# Altium PCB SolarPCB.PcbDoc
Units mil, origin at the board's own origin, x right, y up, seen from the top; angles counter-clockwise.
Board outline 7417.32 x 4742 mil, 2 copper layers (Top Layer, Bottom Layer); 114 components, 75 nets, 476 pads, 105 vias.
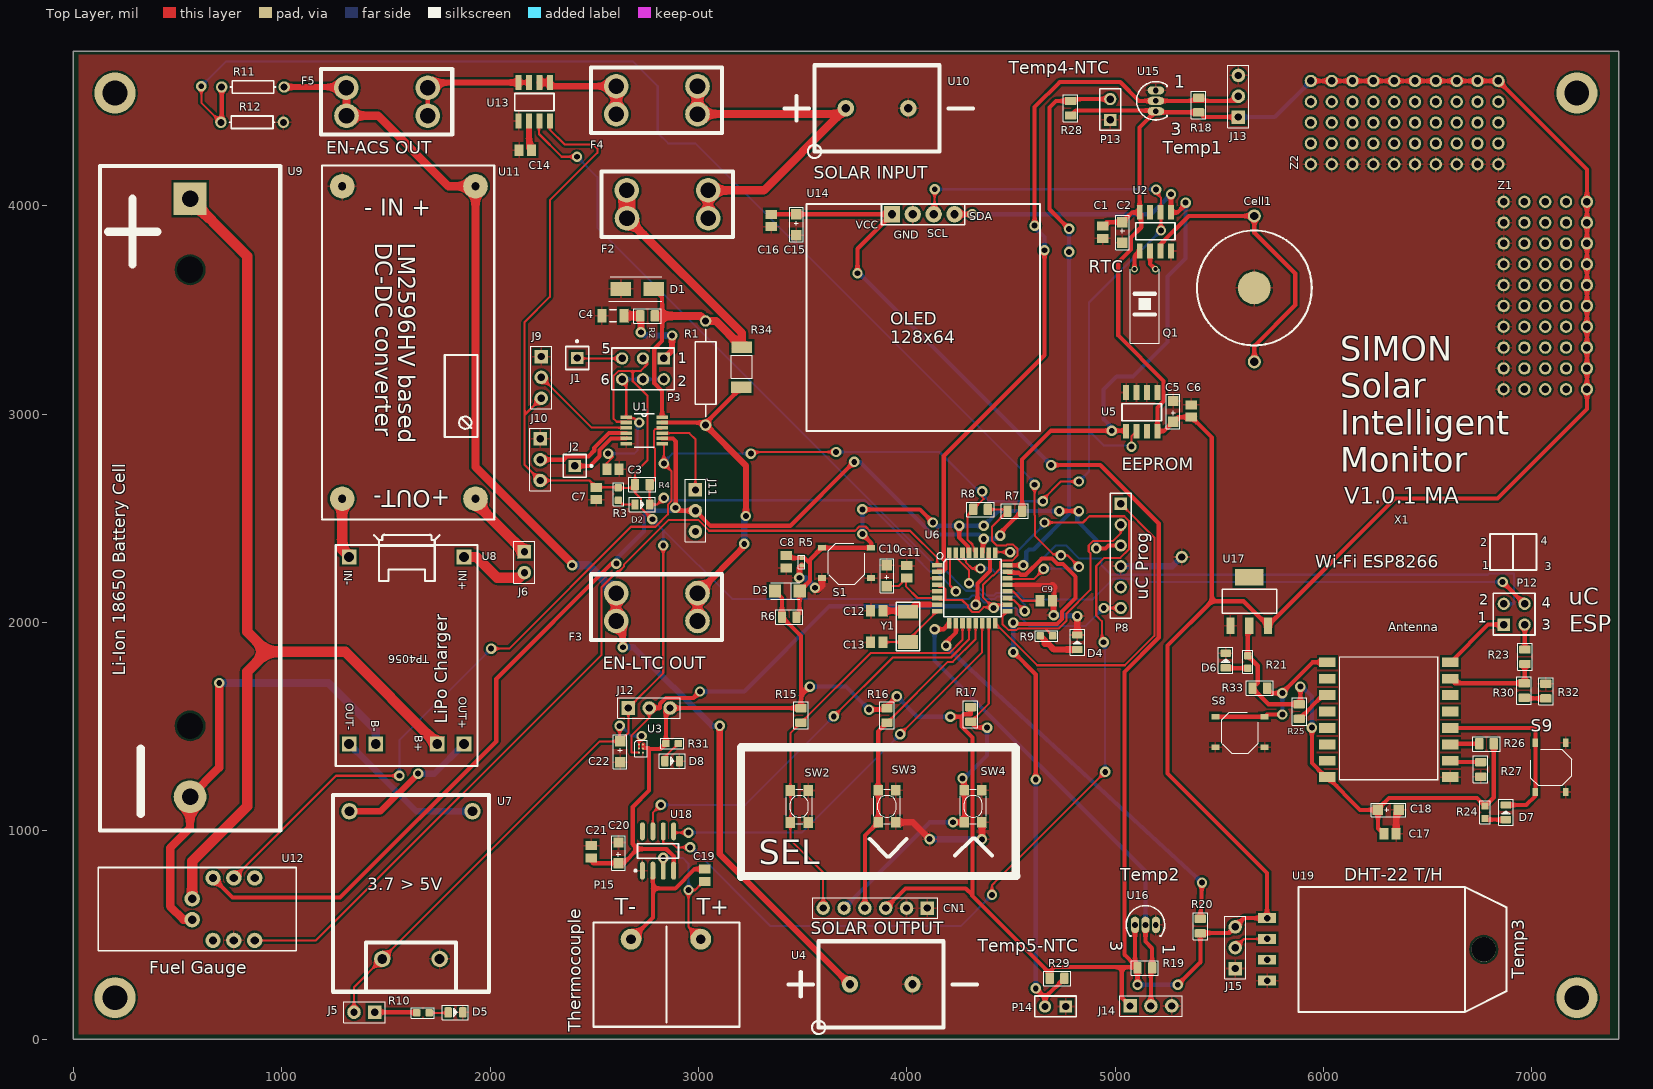
[diagram p0: Top Layer view]
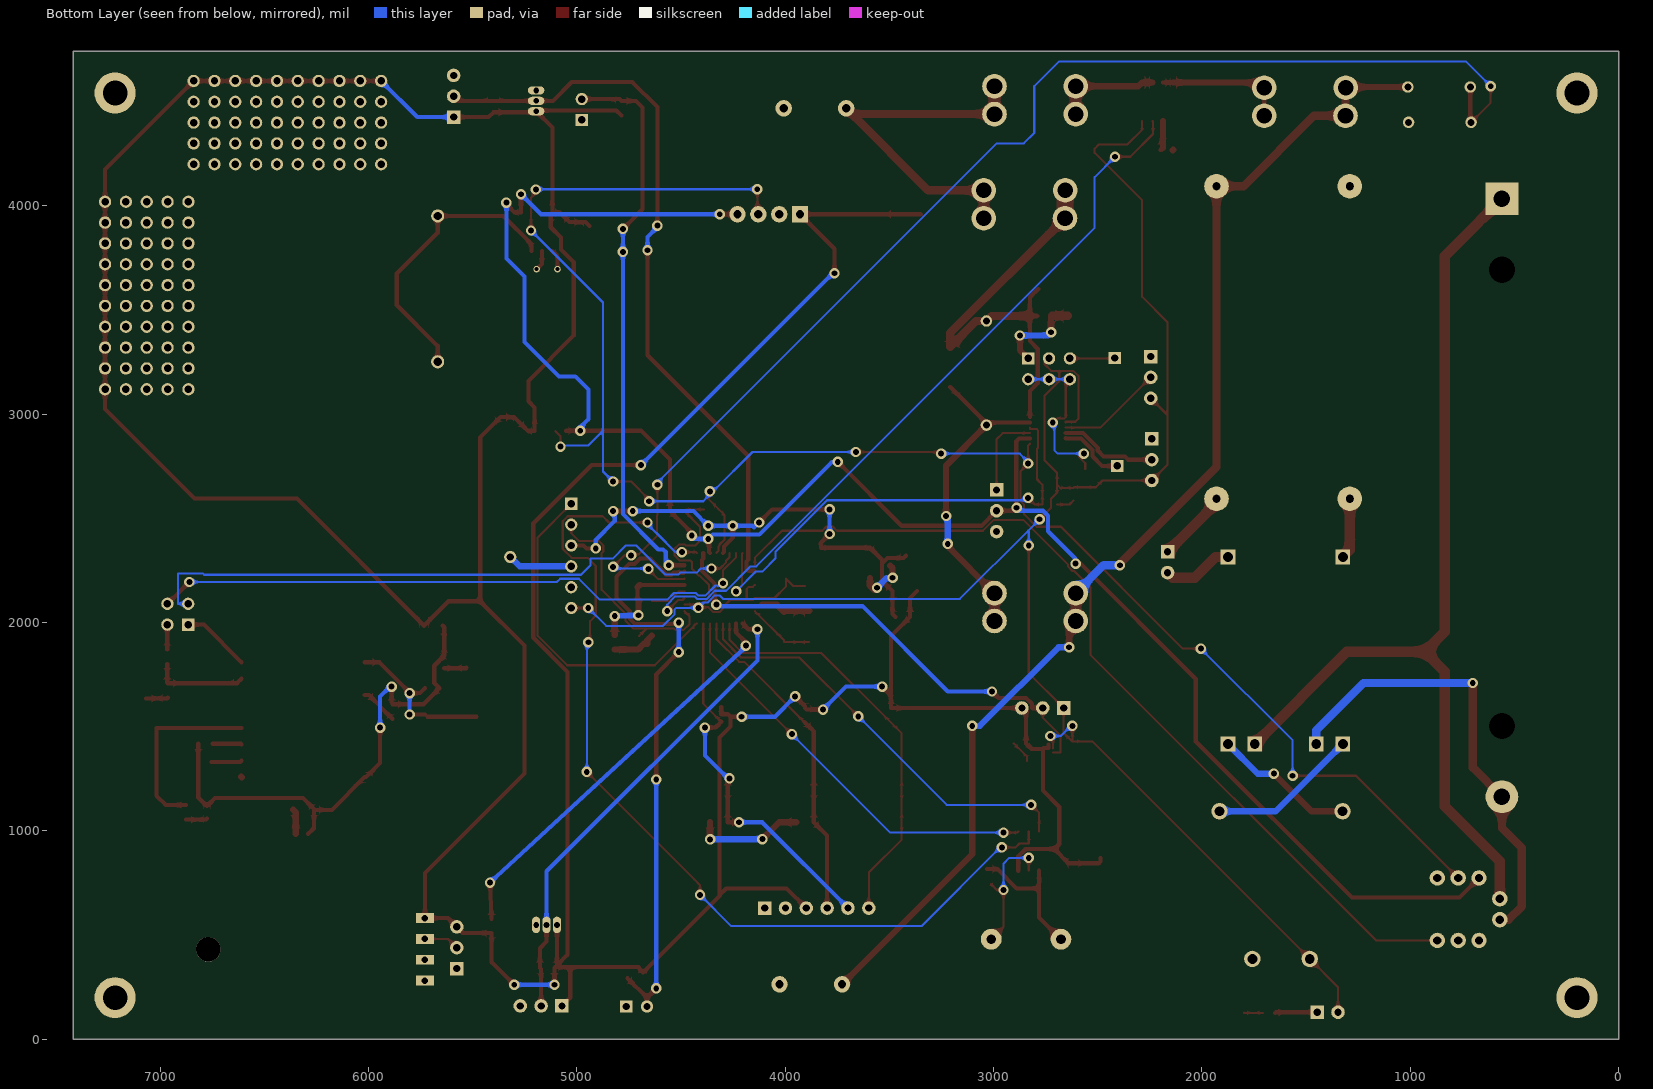
[diagram p1: Bottom Layer view, seen from below]

## Layer stack, top to bottom
Top Solder: solder mask 0.4, Solder Resist, Dk 3.5
Top Layer: signal copper 1.4
Dielectric 1: dielectric 12.6, FR-4, Dk 4.8
Bottom Layer: signal copper 1.4
Bottom Solder: solder mask 0.4, Solder Resist, Dk 3.5

## Board outline
0,0 7417.32,0 7417.32,4742 0,4742

## Design rules (kind name [scope] priority, off if disabled: settings)
Clearance [All] p1: gap=6 except(10: Arc-Poly Track-Poly SMDPad-Poly THPad-Poly Via-Poly Fill-Poly Poly-Poly)
HoleSize [All] p1: absolutevalues=TRUE maxlimit=130 minlimit=1 maxpercent=80.000 minpercent=20.000
MinimumSolderMaskSliver [All] p1: minsoldermaskwidth=1
NetsToIgnore [InNet('GND')] p1:
PolygonConnect [All] p1: connectstyle=Relief reliefconductorwidth=10 reliefentries=4 polygonreliefangle="90 Angle" airgapwidth=10
RoutingLayers "Schematic Routing Layers_1" [InNet('XTAL2')] p1: top layer_v5=TRUE bottom layer_v5=FALSE
RoutingLayers "Schematic Routing Layers" [InNet('XTAL1')] p2: top layer_v5=TRUE bottom layer_v5=FALSE
RoutingLayers [All] p3: top layer_v5=TRUE bottom layer_v5=TRUE
RoutingVias [All] p1: holewidth=28 width=50 viastyle="Through Hole" minholewidth=28 minwidth=50 maxholewidth=28 maxwidth=50
SilkToSilkClearance [All] p1: silktosilkclearance=0.1
SilkToSolderMaskClearance [IsPad] p1: minsilkscreentomaskgap=0.01 clearancetoexposedcopper=TRUE
SolderMaskExpansion [All] p1: expansion=4
Width "Schematic Width Constraint_1" [InNetClass('Undefined')] p1: maxlimit=50 minlimit=20 preferedwidth=30 minimp=50.000000 maximp=50.000000 favimp=50.000000
Width "Schematic Width Constraint" [InNet('VCC-5V-EN')] p2: maxlimit=20 minlimit=10 preferedwidth=20 minimp=50.000000 maximp=50.000000 favimp=50.000000
Width [All] p3: maxlimit=100 minlimit=10 preferedwidth=10
25 further rules are at their usual default settings.

## Classes and differential pairs
net class Undefined: ACS-OUT BAT-OUT+ BAT-OUT- BATT-CHG+ BATT-CHG- GND NetJ6_1 PWR5+ PWR5- S-IN

## Components (designator, comment, footprint, x,y, rotation, side; value= is the part's Value field where it differs from the comment)
C1 "302010165" C0805 4940.54,3873.91 r90 top
C2 "302020002" AVX-A 5035.54,3872.38 r270 top
C3 "302010165" C0805 2590,2737 r180 top
C4 "302010189" C1206 2590,3473 r0 top
C5 "302020002" AVX-A 5279.14,3013.78 r90 top
C6 "302010165" C0805 5366.14,3015.78 r270 top
C7 "302010165" C0805 2510,2620 r90 top
C8 "302010165" C0805 3421.12,2291.48 r270 top
C9 "302010165" C0805 4670,2105 r180 top
C10 "302020002" AVX-A 3905,2225 r90 top
C11 "302010165" C0805 4000,2244.09 r270 top
C12 "302010018" C0805 3856.12,2056.48 r0 top
C13 "302010018" C0805 3856.12,1906.48 r0 top
C14 "1nF Filter" C0805 2169.29,4267.72 r0 top
C15 "302020002" AVX-A 3470,3910 r270 top
C16 "302010165" C0805 3350,3930 r90 top
C17 "302010165" C0805 6319.91,986.24 r180 top
C18 "302020002" AVX-A 6311.91,1101.24 r0 top
C19 "302010175" C0805 3031.5,787.4 r270 top
C20 "302020002" AVX-A 2616.49,894.72 r90 top
C21 "302010165" C0805 2486.49,900.25 r270 top
C22 "302020002" AVX-A 2624.13,1380.22 r270 top
Cell1 "Cell-CR1616" CELLCR1616 5668.54,3252.05 r90 top
CN1 "Keypad Header" H6-2.54 3849.21,629.92 r270 top
D1 "SMAJ75A-13-F" SMAJ5.0-TVS 2628.52,3602 r0 top
D2 "304090046" LED-0805 2731,2567 r0 top
D3 "Diode" "1206 DIODE SMD" 3486.12,2151.48 r180 top
D4 "304090046" LED-0805 4818.9,1905.51 r90 top
D5 "304090046" LED-0805 1834.06,128.87 r0 top
D6 "304090046" LED-0805 5530.91,1818.24 r90 top
D7 "304090046" LED-0805 6875.91,1089.24 r90 top
D8 "304090046" LED-0805 2874.13,1335.22 r0 top
F2 "3568  36-3568-ND" "FUSE HOLDER MINI BLADE ATC" 3047.24,4007.87 r180 top
F3 "3568  36-3568-ND" "FUSE HOLDER MINI BLADE ATC" 2996.06,2074.8 r180 top
F4 "3568  36-3568-ND" "FUSE HOLDER MINI BLADE ATC" 2996.06,4507.87 r180 top
F5 "3568  36-3568-ND" "FUSE HOLDER MINI BLADE ATC" 1700.79,4500 r180 top
J1 "Socket" PIN1 2418,3270 r0 top
J2 "Socket" PIN1 2406,2752 r270 top
J5 "Jumper 2Pin" H2-2.54 1397.06,129.87 r270 top
J6 "Test DC-DC Ouput" H2-2.54 2165,2290 r0 top
J9 "ADR1" H3-2.54 2246,3177 r0 top
J10 "ADR0" H3-2.54 2241,2782 r0 top
J11 "ADR0" H3-2.54 2986,2537 r0 top
J12 "Wakeup Test" H3-2.54 2764.13,1590.22 r90 top
J13 "TP DS18B20" H3-2.54 5592.02,4526.43 r180 top
J14 "TP DS18B20" H3-2.54 5172.03,159.95 r90 top
J15 "TP DHT" H3-2.54 5576.79,439.62 r180 top
P3 "Header 3X2" HDR2X3 2834,3268 r180 top
P8 "320020077" HDR1X6 5027.56,2570.08 r270 top
P12 "Header 2X2" HDR2X2 6865.91,1990.24 r0 top
P13 "Thermistor A" HDR1X2 4976.86,4412.83 r90 top
P14 "Thermistor B" HDR1X2 4763.78,157.48 r180 top
P15 "Thermocouple" SCREWTERMINAL8.5 2677.17,480.32 r0 top
Q1 "32.768KHz" RTC-XTAL 5093.54,3696.38 r0 top
R1 "Res Semi" AXIAL-0.5 3034.7,3197.79 r270 top
R2 "51Ohm" R0805 2756,3472 r270 top
R3 "301010297" R0603 2616,2617 r0 top
R4 "301010361" R0805 2731,2662 r270 top
R5 "301010006" R0402 3496.12,2291.48 r180 top
R6 "301010361" R0805 3436.12,2026.48 r90 top
R7 "4.7K" R0805 4519.12,2535.48 r270 top
R8 "4.7K" R0805 4354.33,2543.31 r90 top
R9 "301010297" R0603 4671.12,1936.48 r270 top
R10 "301010297" R0603 1678.06,126.87 r270 top
R11 "50K" AXIAL-0.3 862.2,4570.87 r0 top
R12 "5K" AXIAL-0.3 858.27,4401.57 r180 top
R15 "301010361" R0805 3492.13,1554.69 r180 top
R16 "301010361" R0805 3905.51,1554.69 r180 top
R17 "301010361" R0805 4307.09,1559.49 r180 top
R18 "10K" R0805 5401.02,4484.43 r180 top
R19 "10K" R0805 5143.03,342.95 r90 top
R20 "10K" R0805 5409.45,543.31 r0 top
R21 "301010297" R0603 5636.91,1811.24 r180 top
R23 "301010311" R0805 6966.91,1836.24 r180 top
R24 "301010297" R0603 6775.91,1089.24 r180 top
R25 "301010361" R0805 5884.91,1573.24 r180 top
R26 "301010361" R0805 6782.91,1418.24 r90 top
R27 "301010361" R0805 6754.91,1295.24 r180 top
R28 "10K" R0805 4786.86,4468.83 r180 top
R29 "10K" R0805 4721.72,292.57 r90 top
R30 "301010311" R0805 6963.91,1674.24 r180 top
R31 "301010297" R0603 2874.13,1420.22 r270 top
R32 "301010311" R0805 7067.91,1671.24 r0 top
R33 "301010361" R0805 5694.91,1685.24 r270 top
R34 "Resistor Sense 2010" "RESISTOR SENSE 2010" 3212.6,3322.83 r270 top
S1 "311020017" SW4-SMD-5.2X5.2X1.5MM 3711.12,2286.48 r180 top
S8 "311020017" SW4-SMD-5.2X5.2X1.5MM 5600,1475 r180 top
S9 "311020017" SW4-SMD-5.2X5.2X1.5MM 7090,1305 r270 top
SW2 "311020045" SW4-SMD-4.2X3.2X2.5MM 3484.19,1117.52 r90 top
SW3 "311020045" SW4-SMD-4.2X3.2X2.5MM 3905.51,1118.11 r90 top
SW4 "311020045" SW4-SMD-4.2X3.2X2.5MM 4318.9,1118.11 r90 top
U1 "LTC2945" LTC2945 2685.04,2842.52 r0 top
U2 "DS1307Z+" SO08 5193.54,3876.38 r0 top
U3 "ADP119" BGA3X2 2714.13,1414.91 r0 top
U4 "Solar OUTPUT PG" KF128-2P 3727.56,263.78 r0 top
U5 "24LC256" SO08 5128.14,3011.78 r180 top
U6 "ATmega328P-AU" TQFP32-0.8-7X7MM 4314.96,2165.35 r0 top
U7 "Boost 3.7V -5V" "BOOST COV" 1325.2,1094.38 r0 top
U8 "TP4056 BAT CHARGER" TP4056 1291.65,1333.81 r180 top
U9 "LI-ION" CELL-HOLDER 560.2,4034.02 r270 top
U10 "Solar Input PG" KF128-2P 3707.87,4468.5 r0 top
U11 "LM2596HV" "LM2596HVS DC-DC STEP-DOWN MODULE" 1990.2,2494.38 r270 top
U12 "MAX17043" MAX17043 574.61,621.54 r90 top
U13 "ACS712 20A Current Sensor" SO08 2212.6,4500 r180 top
U14 "OLED-128x64-SSD1306" OLED-128X64 3503.94,2937.01 r0 top
U15 "DS18B20" TO-92 5196.02,4504.43 r0 top
U16 "DS18B20" TO-92 5146.03,548.95 r270 top
U17 "AMS1117" AMS1117-3.3 5553.75,1984.96 r0 top
U18 "MAX6675" SO8_N 2806.49,903.72 r90 top
U19 "DHT22" DHT22_AM2303_HORIZ 6279.79,431.62 r270 top
X1 "ESP-12" ESP-12 6314.19,1632.25 r0 top
Y1 "306010054" SMT_XTAL 4006.12,2052.15 r270 top
Z1 "Rework Area" Rework 6865,3120 r90 top
Z2 "Rework Area" Rework 6840,4200 r180 top

## Footprints (in the part's own frame and the unit in brackets; to place one, negate y for a bottom-side part, rotate by r counter-clockwise, add the part's x,y. Pads: shape width x height; smd on the part's side, far side on the other; paste and mask are expansions set on the pad)
"1206 DIODE SMD" [mm] "CD1206-S01575CT-ND"
  rect 1.5x1.6 smd: 1(0,0) 2(3,0)
  silkscreen extent 0,-1 3.5,1
AMS1117-3.3 [mm]
  rect 3.5x2 smd: 0(2.29,5.9)
  rect 1x2 smd: 1(0,0) 2(2.29,0) 3(4.58,0)
  silkscreen extent -1,1.52 5.65,4.44
AVX-A [mil]
  rect 50x50 smd: +(-50,0) -(50,0)
  silkscreen extent -82,-32 82,33
AXIAL-0.3 [mm] "Axial Device, Thru-Hole; 2 Leads; 0.3 in Pin Spacing"
  round 1.4 hole 0.85: 1(-3.81,0) 2(3.81,0)
  silkscreen extent -2.77,-0.76 2.77,0.76
AXIAL-0.5 [mm] "Axial Device, Thru-Hole; 2 Leads; 0.5 in Pin Spacing"
  round 1.4 hole 0.85: 1(-6.35,0) 2(6.35,0)
  silkscreen extent -5.33,-1.27 5.33,1.27
BGA3X2 [mm]
  round 0.25 smd: A1(0,0) A2(0.5,0) B1(0,-0.5) B2(0.5,-0.5) C1(0,-1) C2(0.5,-1)
  silkscreen extent -0.5,-1.5 1,0.5
"BOOST COV" [mm] "3.7 to 5V"
  round 2 hole 1.2: IN+(0,0) IN-(15,0) OUT+(4,-18) OUT-(11,-18)
  silkscreen extent -2,-22 17,2
C0805 [mm] "Chip Capacitor, Body 2.0x1.3mm, IPC High Density"
  rect 1.1x1.4 smd: 1(-0.75,0) 2(0.75,0)
  body extent -1.1,-0.72 1.1,0.72, height 1.4
C1206 [mm] "Chip Capacitor, Body 3.2x1.6mm, IPC High Density"
  rect 1.1x1.7 smd: 1(-1.35,0) 2(1.35,0)
  silkscreen extent -0.4,-0.75 0.4,0.75, body extent -1.7,-0.9 1.7,0.9, height 1.3
CELL-HOLDER [mm] "18056"
  rect 4x4 hole 2: 1(0,0)
  round 4 hole 2: 2(72.9,0)
  round 3 hole 3.2: " "(8.645,0) " "(64.255,0)
  silkscreen extent -4,-11 77,11
CELLCR1616 [mm]
  round 1.6 hole 1: 1+(0,0) 2+(17.78,0)
  round 4 smd: 3-(9,0)
  silkscreen extent 2,-7 16,7
DHT22_AM2303_HORIZ [mil]
  rect 47.2x85 hole 31.4: DATA(-50,-550) GND(150,-550) NC(50,-550) VDD(-150,-550)
  round 118.11 hole 118.11 unplated: ""(0,490)
  silkscreen extent -300,-400 300,600, body extent -295,-394 295,591, height 315
ESP-12 [mm]
  rect 2x1.2 smd: 1(-7.5,4.5) 2(-7.5,2.5) 3(-7.5,0.5) 4(-7.5,-1.5) 5(-7.5,-3.5) 6(-7.5,-5.5) 7(-7.5,-7.5) 8(-7.5,-9.5) 9(7.5,-9.5) 10(7.5,-7.5) 11(7.5,-5.5) 12(7.5,-3.5) 13(7.5,-1.5) 14(7.5,0.5) 15(7.5,2.5) 16(7.5,4.5)
  Mechanical 8 keep-out region: -8,6 8,6 8,13 -8,13
  Mechanical 9 keep-out region: -8,6 8,6 8,13 -8,13
  silkscreen extent -6,-9.8 6,5.21
"FUSE HOLDER MINI BLADE ATC" [mm] "20A Fuse Holder Thru"
  round 3 hole 1.9: 1(0,1.7) 1(0,-1.7) 2(9.9,1.7) 2(9.92,-1.7)
  silkscreen extent -3,-4 13,4
H2-2.54 [mil]
  rect 65x65 hole 35: 1(0,50)
  round 65 hole 35: 2(0,-50)
  silkscreen extent -50,-100 50,100
H3-2.54 [mil]
  rect 65x65 hole 35: 1(0,100)
  round 65 hole 35: 2(0,0) 3(0,-100)
  silkscreen extent -50,-150 50,150
H6-2.54 [mil]
  rect 65x65 hole 35: 1(0,250)
  round 65 hole 35: 2(0,150) 3(0,50) 4(0,-50) 5(0,-150) 6(0,-250)
  silkscreen extent -50,-300 50,300
HDR1X2 [mm] "Connector; Header; 2 Position"
  rect 1.5x1.5 hole 0.9: 1(0,0)
  round 1.5 hole 0.9: 2(2.54,0)
  silkscreen extent -1.27,-1.27 3.81,1.27
HDR1X6 [mm] "Connector; Header; 6 Position"
  rect 1.5x1.5 hole 0.9: 1(0,0)
  round 1.5 hole 0.9: 2(2.54,0) 3(5.08,0) 4(7.62,0) 5(10.16,0) 6(12.7,0)
  silkscreen extent -1.27,-1.27 13.97,1.27
HDR2X2 [mm] "Connector; Header; 2x2 Position"
  rect 1.5x1.5 hole 0.9: 1(0,0)
  round 1.5 hole 0.9: 2(0,2.54) 3(2.54,0) 4(2.54,2.54)
  silkscreen extent -1.27,-1.27 3.81,3.81
HDR2X3 [mm] "Connector; Header; 3x2 Position"
  rect 1.5x1.5 hole 0.9: 1(0,0)
  round 1.5 hole 0.9: 2(0,2.54) 3(2.54,0) 4(2.54,2.54) 5(5.08,0) 6(5.08,2.54)
  silkscreen extent -1.27,-1.27 6.35,3.81
KF128-2P [mm] "7.62mm pitch power connector"
  round 2 hole 1: 1(0,0) 2(7.62,0)
  silkscreen extent -7.5,-6.06 15.5,5.25
LED-0805 [mil]
  rrect25% 35x50 smd: +(-35,0) -(35,0)
  silkscreen extent -62,-35 62,35
"LM2596HVS DC-DC STEP-DOWN MODULE" [mil]
  round 118.11 hole 36 slot 37.8 at 0 deg: 1(-1600,-60) 2(-1600,-700) 3(-100,-700) 4(-100,-60)
  silkscreen extent -1700,-797 0,30
LTC2945 [mil] "12MSOP"
  rect 55x17 smd: 1(-31,144) 2(-31,118) 3(-31,93) 4(-31,67) 5(-31,42) 6(-31,16) 7(141,16) 8(141,42) 9(141,67) 10(141,93) 11(141,118) 12(141,144)
  silkscreen extent 7,0 103,160
MAX17043 [mil] "Fuel Guage"
  round 74 hole 40: 1(-47.16,4.41) 2(-147.16,-95.59) 3(-147.16,-195.59) 4(-147.16,-295.59) 5(152.84,-295.59) 6(152.84,-195.59) 7(152.84,-95.59) 8(52.84,4.41)
  silkscreen extent -197,-496 203,454
OLED-128X64 [mm] "SSD1306 OLED 128x64 I2C"
  rect 2x2 hole 1: 1(10.806,25.985)
  round 2 hole 1: 2(13.346,25.985) 3(15.886,25.985) 4(18.426,25.985)
  silkscreen extent 0.39,-0.43 28.84,27.25
PIN1 [mm] "Connector; Plug"
  rect 1.5x1.5 hole 0.9: 1(0,0)
  silkscreen extent -1.4,-1.4 1.4,2.17
R0402 [mil]
  rrect50% 19.69x19.69 smd: 1(0,18.21) 2(0,-18.21)
  silkscreen extent -16,-33 16,33
R0603 [mil]
  rrect25% 35x35 smd: 1(0,30) 2(0,-30)
  silkscreen extent -25,-55 25,55
R0805 [mil]
  rrect25% 55x40 smd: 1(0,35) 2(0,-35)
  silkscreen extent -35,-65 35,65
"RESISTOR SENSE 2010" [mm]
  rect 1.4x2.5 smd: 1(0,-0.1) 2(4.9,-0.2)
  silkscreen extent 1,-1.37 3.8,1.17
Rework [mm]
  round 1.5 hole 0.9: 1(0,0) 2(2.54,0) 3(5.08,0) 4(7.62,0) 5(10.16,0) 6(12.7,0) 7(15.24,0) 8(17.78,0) 9(20.32,0) 10(22.86,0) 11(22.86,-2.54) 12(20.32,-2.54) 13(17.78,-2.54) 14(15.24,-2.54) 15(12.7,-2.54) 16(10.16,-2.54) 17(7.62,-2.54) 18(5.08,-2.54) 19(2.54,-2.54) 20(0,-2.54) 21(0,-5.08) 22(2.54,-5.08) 23(5.08,-5.08) 24(7.62,-5.08) 25(10.16,-5.08) 26(12.7,-5.08) 27(15.24,-5.08) 28(17.78,-5.08) 29(20.32,-5.08) 30(22.86,-5.08) 31(22.86,-7.62) 32(20.32,-7.62) 33(17.78,-7.62) 34(15.24,-7.62) 35(12.7,-7.62) 36(10.16,-7.62) 37(7.62,-7.62) 38(5.08,-7.62) 39(2.54,-7.62) 40(0,-7.62) 41(0,-10.16) 42(2.54,-10.16) 43(5.08,-10.16) 44(7.62,-10.16) 45(10.16,-10.16) 46(12.7,-10.16) 47(15.24,-10.16) 48(17.78,-10.16) 49(20.32,-10.16) 50(22.86,-10.16)
RTC-XTAL [mm] "RTC Crystal 32.768KHz"
  round 0.8 hole 0.5: 1(0,0) 2(2.54,0)
  silkscreen extent -0.5,-9 3,0
SCREWTERMINAL8.5 [mm] "KF8500 Greeen Screw Terminal for Thermocouple"
  round 2.54 hole 1.2: 1(0,0) 2(8.5,0)
  silkscreen extent -4.57,-10.67 13.21,2.03
SMAJ5.0-TVS [mm] "400W SURFACE MOUNT TRANSIENT VOLTAGE SUPPRESSOR"
  rect 2.5x1.7 smd: 1(0,0) 2(4,0)
  silkscreen extent -1.5,-1.5 5,1.5
SMT_XTAL [mm]
  rect 1.7x2.4 smd: 1(0,0) 2(3.7,0)
  silkscreen extent -1.15,-1.45 4.75,1.45
SO08 [mm]
  rect 0.72x1.78 smd: 1(-1.905,-2.35) 2(-0.635,-2.35) 3(0.635,-2.35) 4(1.905,-2.35) 5(1.905,2.35) 6(0.635,2.35) 7(-0.635,2.35) 8(-1.905,2.35)
  silkscreen extent -2.4,-1 2.4,1.1
SO8_N [mm] "SOIC, 8-Leads, Body 4.9x3.9mm, Pitch 1.27mm, IPC Medium Density"
  oval 2.2x0.6 smd: 1(-2.4,1.905) 2(-2.4,0.635) 3(-2.4,-0.635) 4(-2.4,-1.905) 5(2.4,-1.905) 6(2.4,-0.635) 7(2.4,0.635) 8(2.4,1.905)
  silkscreen extent -2.52,-2.5 0.9,2.88, body extent -2,-2.5 2,2.5, height 1.75
SW4-SMD-4.2X3.2X2.5MM [mil]
  rect 51.18x45.28 smd: 1(-76.77,42.32) 2(76.77,42.32) 3(-76.77,-42.32) 4(76.77,-42.32)
  silkscreen extent -83,-63 83,63
SW4-SMD-5.2X5.2X1.5MM [mm]
  rect 1x0.7 smd: 1(-3,1.85) 2(3,1.85) 3(-3,-1.85) 4(3,-1.85)
  silkscreen extent -2.2,-2.4 2.2,2.6
TO-92 [mm] "TO, Flat Index; 3 In-Line, Axial Leads; Body Dia. 4.6mm; Leads 0.41 x 0.39 mm (max)"
  oval 2x1 hole 0.7: 1(0,1.27) 2(0,0) 3(0,-1.27)
  silkscreen extent -2.34,-2.34 1.35,2.34
TP4056 [mm] "BAT CHARGER"
  rect 1.8x1.8 hole 1.199: 1(-14.817,-24.922) 2(-0.817,-24.922) 3(-14.817,-2.118) 4(-0.817,-2.118) 5(-11.566,-2.118) 6(-4.068,-2.118)
  silkscreen extent -16.45,-27.63 0.82,0.55
TQFP32-0.8-7X7MM [mil]
  rect 50x22 smd: 1(-169,110.24) 2(-169,78.74) 3(-169,47.24) 4(-169,15.75) 5(-169,-15.75) 6(-169,-47.24) 7(-169,-78.74) 8(-169,-110.24) 17(169,-110.24) 18(169,-78.74) 19(169,-47.24) 20(169,-15.75) 21(169,15.75) 22(169,47.24) 23(169,78.74) 24(169,110.24)
  rect 22x50 smd: 9(-110.24,-169) 10(-78.74,-169) 11(-47.24,-169) 12(-15.75,-169) 13(15.75,-169) 14(47.24,-169) 15(78.74,-169) 16(110.24,-169) 25(110.24,169) 26(78.74,169) 27(47.24,169) 28(15.75,169) 29(-15.75,169) 30(-47.24,169) 31(-78.74,169) 32(-110.24,169)
  silkscreen extent -170,-138 138,170

## Part data
C1 C3 C6 C7 C8 C9 C11 C16 C17 C21: library part CERAMIC-100NF-50V-10%-X7R(0805), "100nF"
C2 C5 C10 C15 C18 C20 C22: library part TANTALUM-SMD-10UF-16V-10%(AVX-A), "10uF Cap Decoupling 16V"
C4: library part CERAMIC-1NF-1KV-10%-X7R?(1206)
C12 C13: library part CERAMIC-22PF-50V-5%-NPO(0402)
C14: library part CERAMIC-100NF-25V-10%-X7R(0402), "1nF Filter Cap as per Datasheet"
C19: library part CERAMIC-10NF-50V-5%-X7R(0805)
CN1: library part DIP-BLACK-FEMALE-HEADER-VERT(6P-2.54)
D1: library part "D Schottky", "SMA"
D2 D4 D5 D6 D7 D8: library part SMD-LED-CLEAR-RED(0805)
D3: "Default Diode"
F2 F3 F4 F5: library part "Fuse 2", "3568  36-3568-ND FUSE HOLDER"
J5 J6: library part Jumper, "2.54, Pin header"
J9 J10 J11 J12 J13 J14 J15: library part "Jumper Select", "2.54mm Pitch male header"
P3: "Header, 3-Pin, Dual row"
P8: library part DIP-BLACK-MALE-HEADER(2X3P-2.54)-2.54
P12: "Header, 2-Pin, Dual row"
P13 P14: library part "Header 2", "Header, 2-Pin"
P15: library part ScrewTerminal8.5, "K Type Termocouple"
Q1: library part CRYTALTC38H
R1: "Semiconductor Resistor"
R2 R7 R8 R18 R19 R20 R28 R29: library part RESISTOR0805_NOOUTLINE, "Resistors   For new designs, use the packages preceded by an '_' character since they are more reliable:   The following footprints should be used on most boards: _0402 - Standard footprint for regular board layouts  _0603 - Standard footprint for regular board layouts  _0805 - Standard footprint for regular board layouts  _1206 - Standard footprint for regular board layouts       For extremely tight-pitch boards where space is at a premium, the following 'micro-pitch' footprints can be used (smaller pads, no silkscreen outline, etc.): _0402MP - Micro-pitch footprint for very dense/compact boards  _0603MP - Micro-pitch footprint for very dense/compact boards  _0805MP - Micro-pitch footprint for very dense/compact boards  _1206MP - Micro-pitch footprint for very dense/compact boards"
R3 R9 R10 R21 R24 R31: library part SMD-RES-390R-5%-1/10W(0603)
R4: library part SMD-RES-10K-1%-1/8W(0805), "10K"
R5: library part SMD-RES-1K-5%-1/16W(0402)
R6: library part SMD-RES-10K-1%-1/8W(0805), "Pull up 10K resistor"
R11 R12: library part Res1, "Resistor"
R15 R16 R17 R25 R26 R27 R33: library part SMD-RES-10K-1%-1/8W(0805), "Pull up 10K resistor for button"
R23 R30 R32: library part SMD-RES-1K-5%-1/8W(0805)
R34: "0.02 Ohm Resistor Current Sense"
S1 S8 S9: library part SMD-BUTTON(4P-5.2X5.2X1.5MM-SKQGADE010)-SKQGADE010
SW2 SW3 SW4: library part SMD-BUTTON-TOP-DHT-4235A(4P-4.2X3.2MM)
U1: "V I P Monitor I2C Interface"
U2: "RTC circuit%3B I2C%3B NV SRAM%3B 56B%3B 4.5%C3%B75.5VDC%3B SO8"
U4 U10: library part PG_IN
U6: "8-bit AVR Microcontroller, 32KB Flash, 1KB EEPROM, 2KB SRAM, 32-pin TQFP, Industrial Grade (-40°C to 85°C)"
U7: library part Boost-3.7V-5V, "Boost converter module from Cell to 5V"
U8: library part TP4056, "TP4056 Module"
U9: library part Battery, "Li Ion Battery 3.7V"
U11: "DC DC Adjustable Buck converter input upto 60V"
U12: "Battery Fuel Guage"
U13: library part ACS712
U14: "OLED Display OLED-128x64-SSD1306"
U15 U16: "On Board Temperature Sensor"
U17: "3.3V Regulator"
U18: "K-Thermocoupleto-Digital  Converter"
U19: "Temperature and Humidity Sensor"
Y1: library part SMD-CRYSTAL-16MHZ-8PF-20PPM-40R(2P-5.0X3.2MM)

## Free pads (board coordinates)
  round 59.06 hole 35.43: 5(5320,2315)
  round 196.85 hole 118.11: " "(200,200) " "(200,4542) " "(7217,200) " "(7217,4542)

## Via types
v1: diameter 50, hole 28, Top Layer to Bottom Layer, 105 vias

## Nets (pads, with @x,y where several pads share a name; then routed paths per layer and width w, separated by ;. In a path a pad name is that pad's centre, name@x,y a point inside that pad or via, vN(x,y) a via of type N, cw(c..) or ccw(c..) an arc to the next point about the centre after c; other vN are vias at no path point)
ACS-DATA-OUT: U6.19 U13.7 | length 3625
  Top Layer w10: U13.7 2235,4404.88 2235,4345 2343.78,4236.22 v1(2417.32,4236.22) ; U6.19 4493.46,2108.61 4513.52,2108.61 4566.93,2055.2 v1(4566.93,2055.12)
  Bottom Layer w10: v1(2417.32,4236.22) 2515,4138.54 2515,3894.45 4139.45,2270 4167.28,2270 4284.3,2152.98 4337.89,2152.98 4377.51,2113.35 4423.1,2113.35 4435.74,2125.98 4527.56,2125.98 4566.93,2086.61 v1(4566.93,2055.12)
ACS-OUT: F3.2 F5.2 R11.2 U4.1 U11.1 | length 5864.8
  Top Layer w30: R11.2 F5.2@1306.3,4570.87 ; F3.2@2606.3,2007.87 2637.8,1976.38 v1(2637.8,1881.89) ; v1(3102.36,1503.94) 3102.36,888.98 U4.1
  Top Layer w40: F5.2@1306.3,4570.87 1311.02,4566.14 1311.02,4433.07 1461.93,4433.07 1800.62,4094.38 U11.1 1930.2,2746.97 2393.7,2283.46 v1(2393.7,2275.59) ; F3.2@2605.51,2141.73 2605.51,2008.66 F3.2@2606.3,2007.87
  Bottom Layer w30: v1(2637.8,1881.89) 2688.11,1881.89 3066.06,1503.94 v1(3102.36,1503.94)
  Bottom Layer w40: v1(2393.7,2275.59) 2471.65,2275.59 F3.2@2605.51,2141.73
ADIN: J2.1 U1.5 | length 320.3
  Top Layer w20: J2.1 2479.52,2752 2525.93,2798.41 2525.93,2828.01 2580.94,2883.02 2652.54,2883.02 U1.5
ALERT-LTC2945: D2.- R4.1 U1.10 U6.32 | length 2338
  Top Layer w10: U1.10 2826.04,2929.02 2793.98,2929.02 2787.54,2922.58 2787.54,2839.02 2791,2835.56 2791,2687 R4.1 D2.- 2803.22,2567 v1(2834.65,2598.43) ; U6.32 4207.96,2331.11 4207.96,2177.87 v1(4236.22,2149.61) v1@4236.22,2163.95
  Bottom Layer w10: v1(2834.65,2598.43) 2823.4,2587.18 3799.64,2587.18 4046.99,2339.83 4046.99,2308.01 4109,2246 4140.82,2246 4236.22,2150.6 v1(4236.22,2149.61)
BAT-ALT: U6.1 U12.4 | length 4435.6
  Top Layer w10: U12.4 1164.38,474.38 2535.46,1845.46 2535.46,2170.75 2612.17,2247.46 2621.21,2247.46 2642.3,2268.55 2642.3,2277.59 2858.21,2493.5 2999.8,2493.5 3052.36,2440.94 3752.24,2440.94 3772.49,2461.2 3802.31,2461.2 3822.57,2440.94 4015.75,2440.94 4145.96,2310.73 U6.1
BAT-OUT+: U7.IN+ U8.3 | length 683.5
  Top Layer w30: U7.IN+ 1474.38,1094.38 v1(1655,1275)
  Bottom Layer w30: v1(1655,1275) 1732.8,1275 U8.3
BAT-OUT-: U7.IN- U8.4 | length 725.7
  Bottom Layer w30: U8.4 1646.62,1094.38 U7.IN-
BATT+: U12.2
BATT-CHG+: U8.5 U9.1 U12.8 | length 4662.3
  Top Layer w50: U9.1 775.12,3819.1 834.65,3759.57 834.65,1955.35 930,1860 ; U12.8 570.2,853.66 834.65,1118.11 834.65,1764.65 930,1860 ; U8.5 1304.2,1860 930,1860
BATT-CHG-: U8.6 U9.2 U12.1 | length 2227.5
  Top Layer w30: U12.1@560.2,584.38 U12.1
  Top Layer w40: U12.1 527.98,574.38 464.57,637.8 464.57,917.75 560.2,1013.38 U9.2 700,1303.75 v1(700,1710)
  Bottom Layer w40: v1(700,1710) 1225,1710 1451.8,1483.2 U8.6
CH-PD: R25.1 X1.3 | length 181.1
  Top Layer w20: R25.1 5998.61,1651.94 X1.3
CS-K: U6.25 U18.6 | length 4741
  Top Layer w10: U18.6 2831.49,940 2875.94,940 2894.68,921.26 v1(2960.63,921.26) ; v1(4409.45,692.91) 4409.45,740.16 4437,767.71 v1(4952.76,1283.46) ; U6.25 4429.43,2338.58 v1(4496.06,2338.58) ; v1(4661.42,2480.32) 4846.17,2480.32 4876.46,2510.61 5044.35,2510.61 5068.09,2486.86 5068.09,2353.29 5025.4,2310.61 4975.69,2310.61 4975.53,2310.45 4948.25,2310.45 4909.67,2271.87 4909.67,2034.08 4937.01,2006.74 4937.01,1913.39 v1(4944.88,1905.51)
  Bottom Layer w10: v1(2960.63,921.26) 2968.5,921.26 3346.46,543.31 4259.84,543.31 v1(4409.45,692.91) ; v1(4496.06,2338.58) 4526.98,2338.58 4618.39,2430 4620,2430 4661.42,2471.42 v1(4661.42,2480.32) ; v1(4944.88,1905.51) 4952.76,1897.64 v1(4952.76,1283.46)
DHT-DATA: R20.1 U6.10 | length 1974
  Top Layer w20: v1(4188.98,1889.76) 4188.98,1905.51 4236.22,1952.76 U6.10 ; R20.1 v1(5417.32,752.24)
  Bottom Layer w20: v1@4186.86,1886.8 v1(5417.32,752.24)
DOWN: CN1.4 R16.1 SW3.1 SW3.2 U6.13 | length 1600.5
  Top Layer w10: R16.1 4197.59,1811.76 4221.28,1811.76 4330.71,1921.19 U6.13
  Top Layer w20: CN1.4 3799.21,977.36 SW3.1 SW3.2 3863.19,1477.37 R16.1
DS1820-DATA-1: J13.2 R18.2 U6.2 U15.2 | length 3585.2
  Top Layer w20: U6.2 4150.46,2248.59 4177.59,2248.59 4186.96,2257.97 4186.96,2293.49 4177.72,2302.73 4177.72,2799.77 4661.42,3283.46 v1(4661.42,3787.4) ; v1(4614.17,3905.51) 4614.17,4474.17 4735,4595 5025,4595 5115.57,4504.43 U15.2 5592.02,4504.43 J13.2
  Bottom Layer w20: v1(4614.17,3905.51) 4606.3,3905.51 4661.42,3850.39 v1(4661.42,3787.4)
DS1820-DATA-2: J14.2 R19.2 U6.9 U16.2 | length 2325.9
  Top Layer w20: v1(4133.86,1968.5) 4176.87,1968.5 U6.9 ; U16.2 5146.03,468.97 5178.03,436.97 R19.2 5172.03,336.95 J14.2
  Bottom Layer w20: v1(4133.86,1968.5) 4133.86,1818.9 5146.03,806.72 U16.2
ESP-RXD: P12.4 U6.31 | length 2975.7
  Top Layer w10: U6.31 4236.22,2314.3 4299.21,2251.31 v1(4299.21,2188.98)
  Top Layer w20: v1(6860,2195) 6861.15,2195 P12.4
  Bottom Layer w10: v1(4299.21,2188.98) 4308.21,2188.98 4322.56,2174.63 4326.16,2178.23 4335.26,2178.23 4384.14,2129.35 4416.48,2129.35 4429.11,2141.98 4534.19,2141.98 4565.82,2110.35 4594.1,2110.35 4594.22,2110.24 4890.24,2110.24 4990.61,2210.61 5080.73,2210.61 5096.34,2195 v1(6860,2195)
ESP-TXD: P12.2 U6.30 | length 3037.2
  Top Layer w10: U6.30 4267.72,2314.29 4283.97,2298.04 4283.97,2289.18 4313.31,2259.84 v1(4354.32,2259.84)
  Bottom Layer w10: v1(4354.32,2259.84) 4404.95,2259.84 4424.79,2240 4504.59,2240 ; 4504.59,2239.59 4514.19,2230 4575,2230 4715,2370 4765,2370 4827.91,2307.09 4935,2307.09 4935,2275 4980.45,2229.55 6789.55,2229.55 6795,2235 6913.74,2235 6915,2229.55 6915,2090.24 P12.2
GND: C1.1 C2.- C3.1 C4.1 C5.- C6.1 C7.1 C8.2 C9.1 C10.- C11.1 C12.1 C13.1 C14.1 C15.- C16.1 C17.1 C18.- C20.- C21.1 C22.- Cell1.3- CN1.1 CN1.2 D1.1 D4.- D5.- D6.- D8.- J9.1 J10.1 J13.3 J14.3 J15.1 P8.4 P13.1 P14.1 pad.5 R5.1 R12.1 R27.1 R32.1 S1.1 S1.2 S8.1 S8.2 S9.1 S9.2 SW2.3 SW2.4 SW3.3 SW3.4 SW4.3 SW4.4 U1.6 U2.4 U3.C2 U4.2 U5.1 U5.2 U5.3 U5.4 U6.3 U6.5 U6.21 U7.OUT- U10.2 U11.2 U12.3 U13.5 U14.2 U15.1 U16.1 U17.1 U18.1 U19.GND X1.9 Z1.1 Z1.2 Z1.3 Z1.4 Z1.5 Z1.6 Z1.7 Z1.8 Z1.9 Z1.10 Z2.1 Z2.2 Z2.3 Z2.4 Z2.5 Z2.6 Z2.7 Z2.8 Z2.9 Z2.10 | length 1795.7
  Top Layer w20: U6.21 4698.9,2181.1 ; C9.1@4710,2115.47 4710,2170
  Top Layer w30: C14.1@2137.6,4269.88 C14.1 ; v1(3485,2215) 3485,2262.15 R5.1 ; v1(3559.85,2167.23) 3569.6,2157.48 3574.8,2157.48 3593.01,2175.69 S1.2 ; SW3.3 4029.53,1041.34 v1(4110.24,960.63) ; v1(4361.22,959.64) SW4.3 ; 4698.9,2181.1 4710,2170 ; v1(4705,2035) 4705,2099.53 C9.1 C9.1@4710,2115.47 ; D4.- v1(4818.9,2031.5) ; C17.1 6349.43,1088.77 C18.- ; X1.9 X1.9@6611.48,1260.24
  Bottom Layer w30: v1(3485,2215) 3485,2223.66 3496.06,2212.6 3514.49,2212.6 v1(3559.85,2167.23) ; v1(4110.24,960.63) 4360.23,960.63 v1(4361.22,959.64) ; v1(4705,2035) v1(4818.9,2031.5) ; P8.4 5275.08,2270.08 pad.5
GPIO0: D7.- S9.3 S9.4 X1.12 | length 895.2
  Top Layer w20: X1.12@6610.12,1493.8 X1.12 7017.26,1494.45 7017.91,1493.8 7017.91,1168.68 6973.47,1124.24 D7.-
GPIO2: R26.1 X1.11 | length 139.5
  Top Layer w20: X1.11 6612,1418.24 R26.1
GPIO15: R27.2 X1.10 | length 148.2
  Top Layer w20: X1.10 6616.2,1330.24 R27.2
MISO: P8.1 U6.16 | length 1605.7
  Top Layer w10: U6.16 4626.28,1795.28 5047.24,1795.28 5188.98,1937.01 5188.98,2408.66 P8.1
MOSI: P8.5
NetC3_2: C3.2 P3.2 P3.4 P3.6 U1.1 | length 857.1
  Top Layer w10: C3.2 2560.47,2765.2 2590.55,2795.27 2574.79,2811.02 v1(2566.93,2811.02) ; P3.6 2654.04,3147.96 U1.1 2660.54,2980.02 2692.54,2980.02 2711.94,2960.62 v1(2716.53,2960.62)
  Bottom Layer w10: v1(2566.93,2811.02) 2692.9,2811.02 2708.66,2826.78 v1@2708.66,2960.62 ; P3.6 P3.4 P3.2 ; v1@2708.66,2968.49 v1(2716.53,2960.62)
NetC4_2: C4.2 P3.1 R2.2 | length 440.6
  Top Layer w30: R2.2@2720,3473 R2.2 2724.41,3468.59 v1(2724.41,3393.7) ; P3.1 2874.02,3308.02 v1(2874.02,3377.95)
  Top Layer w40: C4.2 R2.2@2720,3473
  Bottom Layer w30: v1(2724.41,3393.7) 2740.16,3377.95 v1(2874.02,3377.95)
NetC9_2: C9.2 U6.20 | length 175.3
  Top Layer w10: U6.20 4484.36,2150 4510.07,2150 4555.07,2105 C9.2
NetC14_2: C14.2 U13.6 | length 144.4
  Top Layer w20: C14.2@2187.6,4278.94 C14.2
  Top Layer w30: C14.2@2187.6,4278.94 U13.6
NetC19_1: C19.1 P15.1 U18.2 | length 660.5
  Top Layer w20: P15.1 2781.49,584.64 2781.49,724.41 ; U18.2 2781.49,724.41 ; C19.1 2981.93,816.93 2889.41,724.41 2781.49,724.41
NetC19_2: C19.2 P15.2 U18.3 | length 671.3
  Top Layer w10: U18.3 v1(2831.49,870.86) ; C19.2@3011.81,744.09 2984.25,716.54 v1(2952.76,716.54) 2952.76,539.37 P15.2 P15.2@3025.59,494.09
  Bottom Layer w10: v1(2831.49,870.86) 2924.42,870.86 2952.76,842.52 v1(2952.76,716.54)
NetCell1_1+: Cell1.1+ Cell1.2+ U2.3 | length 1401.8
  Top Layer w20: U2.3 5218.54,3816.97 5353.62,3952.05 Cell1.2+ 5668.54,3871.46 5865,3675 5865,3525 5668.54,3328.54 Cell1.1+
NetD1_2: D1.2 F2.2 R1.1 R2.1 R34.1 U1.12 | length 2122.4
  Top Layer w20: D1.2 2826.04,3561.96 2826.04,3472 ; R2.1 2826.04,3472 ; U1.12 2826.04,3111.57 2788.47,3149.14 2788.47,3313.53 2826.04,3351.09 2826.04,3367.95 2825.14,3368.84 2825.14,3402.81 2826.04,3403.71 2826.04,3472
  Top Layer w40: F2.2@2657.48,3940.94 3208.46,3389.96 3208.46,3323.79 3084.46,3447.79 R1.1 3010.49,3472 2826.04,3472
  Top Layer w78.74: F2.2@2656.69,4074.8 2656.69,3941.73 F2.2@2657.48,3940.94
NetD2_+: D2.+ R3.2 | length 88.3
  Top Layer w10: R3.2 2636,2567 D2.+
NetD4_+: D4.+ R9.2 | length 215.1
  Top Layer w30: R9.2 4662.62,1914.98 4662.62,1897.98 4679.62,1897.98 4707.09,1870.51 D4.+
NetD5_+: D5.+ R10.1 | length 91.8
  Top Layer w10: R10.1 1797.06,126.87 D5.+
NetD6_+: D6.+ R21.1 | length 106.8
  Top Layer w20: D6.+ 5532.91,1781.24 R21.1
NetD7_+: D7.+ R24.1 | length 102.1
  Top Layer w20: R24.1 6780.91,1054.24 D7.+
NetD8_+: D8.+ R31.1 | length 111.9
  Top Layer w10: D8.+ 2839.13,1355.22 R31.1
NetF3_1: F3.1 R1.2 R34.2 U1.11 | length 1585.2
  Top Layer w20: U1.11 3021.97,2960.52 R1.2 3034.7,2957.02 R34.2@3208.46,3130.79
  Top Layer w30: F3.1@2996.06,2007.87 2996.06,2141.73 3220.47,2366.14 v1(3220.47,2377.95) ; R1.2 3228.35,2754.14 v1(3228.35,2511.81)
  Bottom Layer w30: v1(3220.47,2377.95) 3220.47,2503.94 v1(3228.35,2511.81)
NetF4_2: F4.2 U13.1 U13.2 | length 509.4
  Top Layer w30: U13.2 U13.1 2305.31,4574.8 F4.2@2605.51,4574.8
  Top Layer w50: F4.2@2605.51,4574.8 2606.3,4574.02 F4.2@2606.3,4440.94
NetF5_1: F5.1 U13.3 U13.4 | length 631.3
  Top Layer w20: F5.1@1700.79,4433.07 1700.79,4566.93 F5.1@1726.38,4592.52 ; U13.4 U13.3
  Top Layer w30: F5.1@1726.38,4592.52 U13.4
NetJ1_1: J1.1 P3.5 | length 216.8
  Top Layer w10: J1.1 2420,3268 P3.5
NetJ5_1: J5.1 R10.2 | length 202.2
  Top Layer w20: J5.1 1645.06,129.87 R10.2
NetJ6_1: J6.1 U11.4 | length 351.6
  Top Layer w50: U11.4 1930.2,2574.8 J6.1
NetJ9_2: J9.2 U1.3 | length 508.1
  Top Layer w10: J9.2 2487.48,2935.52 U1.3
NetJ10_2: J10.2 U1.4 | length 474.5
  Top Layer w20: J10.2 2354.32,2782 2369.85,2797.53 2472.75,2797.53 2499.93,2824.71 2499.93,2838.78 2571.67,2910.52 U1.4@2654.04,2910.52
NetJ11_1: J11.1 U1.9 | length 415.3
  Top Layer w10: U1.9 2956.62,2909.52 2986,2880.14 J11.1
NetJ15_2: J15.2 U19.DATA | length 170.4
  Top Layer w10: J15.2 5618.79,481.62 U19.DATA
NetP12_1: P12.1 X1.16 | length 331.3
  Top Layer w20: X1.16 6790.29,1990.24 P12.1
NetP12_3: P12.3 R23.2 | length 119.4
  Top Layer w20: P12.3 6966.91,1989.24 R23.2
NetQ1_1: Q1.1 U2.1 | length 97.8
  Top Layer w20: Q1.1 5093.54,3758.86 U2.1
NetQ1_2: Q1.2 U2.2 | length 97.8
  Top Layer w20: U2.2 5168.54,3721.38 Q1.2
NetR23_1: R23.1 R30.2 X1.15 | length 456.6
  Top Layer w20: X1.15 6630.91,1709.24 R30.2 6966.91,1712.24 R23.1
NetR30_1: R30.1 R32.2 | length 105.2
  Top Layer w20: R30.1 6966.91,1636.24 R32.2
PWR5+: J6.2 U8.1 | length 341.8
  Top Layer w50: U8.1 1935,2315 2035,2215 2140,2215 J6.2
PWR5-: U8.2 U11.3 | length 293.3
  Top Layer w50: U11.3 1290.2,2348.6 U8.2
RESET: C8.1 D3.1 P8.3 R5.2 R6.2 S1.3 S1.4 U6.29 | length 2556.8
  Top Layer w20: C8.1 3432.44,2309.69 R5.2 3509.21,2309.69 3535.43,2283.46 ; R6.2 3486.12,2041.48 D3.1 3535.43,2200.8 3535.43,2283.46 ; v1(3787.4,2425.2) 3829.23,2383.37 S1.3 S1.4 3535.43,2301.74 3535.43,2283.46 ; v1(3787.4,2543.31) 4062.99,2543.31 v1(4125.98,2480.32) ; v1(4251.97,2464.57) 4251.97,2408.73 4294.72,2365.98 4294.72,2338.84 U6.29 ; v1(4732.28,2535.43) v1(4826.76,2535.43) ; v1(4910,2356) 4954.43,2356 4968.5,2370.08 P8.3
  Bottom Layer w20: v1(3787.4,2425.2) v1(3787.4,2543.31) ; v1(4125.98,2480.32) 4149.61,2456.69 4157.48,2464.57 v1(4251.97,2464.57) v1(4370.08,2464.57) 4440.94,2535.43 v1(4732.28,2535.43) ; v1(4826.76,2535.43) 4818.9,2535.43 4818.9,2488.17 4910,2397.07 v1(4910,2356)
RESET_ESP: R33.1 S8.3 S8.4 X1.1 | length 774.3
  Top Layer w20: S8.4 S8.3 ; S8.3@5729.34,1559.06 v1(5803.15,1559.06) ; R33.1 5753.73,1661.42 v1(5803.15,1661.42) 5803.15,1664.28 5948.29,1809.42 X1.1
  Bottom Layer w20: v1(5803.15,1559.06) v1(5803.15,1661.42)
S-IN: F2.1 F4.1 U10.1 | length 1736.7
  Top Layer w40: F4.1@2996.06,4440.94 3680.31,4440.94 3314.17,4074.8 3047.25,4074.8 F2.1@3047.24,3940.94
  Top Layer w50: F4.1@2996.06,4440.94 F4.1@2996.06,4574.8
SCK: P8.2 R9.1 U6.17 | length 1091.7
  Top Layer w10: U6.17 4460.05,2031.21 4460.05,1992.96 4489.01,1964 4526.72,1964 4534.59,1971.87 4665.73,1971.87 ; R9.1 4665.73,1971.87 ; P8.2 5027.56,2429.13 4989.5,2391.08 4925.83,2391.08 4924.91,2392 4895.09,2392 4874,2370.91 4874,2341.09 4881.89,2333.2 4881.89,2157.48 4767,2042.59 4767,2009.32 4729.55,1971.87 4665.73,1971.87
SCK-K: U6.14 U18.5 | length 1980.1
  Top Layer w10: U18.5 2887.57,992.13 v1(2952.76,992.13) ; v1(3968.5,1464.57) 4362.2,1858.26 U6.14
  Bottom Layer w10: v1(2952.76,992.13) 3496.06,992.13 v1(3968.5,1464.57)
SCL: R8.1 U1.7 U2.6 U5.6 U6.28 U12.6 U14.3 | length 8987.8
  Top Layer w10: U12.6 1260.82,1265 v1(1565,1265) ; v1(2005,1875) 2091.69,1875 2676.76,2460.06 2794.44,2460.06 2853.76,2519.39 2853.76,2566.09 2870.65,2582.97 2870.65,2727.77 v1(2834.64,2763.77) 2834.64,2849.92 U1.7 ; v1(3251.97,2811.02) 3244.09,2818.9 v1(3661.42,2818.9) ; U14.3@4133.86,3964.53 4133.86,4078.86 v1(4135,4080) v1@4135,4061.85 ; U6.28 4321.21,2343.85 4321.21,2363.91 4315.72,2369.4 4315.72,2374.68 4291.34,2399.06 4291.34,2515.31 R8.1 4370.08,2594.05 4362.2,2601.93 v1(4362.2,2629.92) ; v1(4653.53,2582.67) 4653.53,2590.54 4740.16,2677.17 v1(4826.77,2677.17) ; v1(5079,2845) 5079,2895.12 U5.6 ; v1(5196.85,4078.74) 5196.85,4063.15 5220,4040 5220,3970.35 U2.6 5220.47,3966.97 v1(5220.47,3881.89)
  Bottom Layer w10: v1(1565,1265) 1565,1435 v1(2005,1875) ; v1(2834.64,2763.77) 2834.64,2771.65 2874.02,2811.02 v1(3251.97,2811.02) ; v1(3661.42,2818.9) 4157.48,2818.9 4346.46,2629.92 v1(4362.2,2629.92) 4362.2,2614.17 4393.71,2582.67 v1(4653.53,2582.67) ; v1(4135,4080) 5187.72,4080 5196.85,4070.87 v1(5196.85,4078.74) ; v1(4826.77,2677.17) 4875,2725.39 4875,2920.28 ; 4921.26,2874.02 4875,2920.28 ; v1(5079,2845) 5081.2,2845 5086.6,2850.39 4944.88,2850.39 4875,2920.28 ; v1(5220.47,3881.89) 4875,3536.42 4875,2920.28
SDA: J11.2 R7.1 U1.8 U2.5 U5.5 U6.27 U12.7 U14.4 | length 9155.1
  Top Layer w20: U12.7 764.57,680 1280,680 2030,1430 2030,1730 2583.46,2283.46 v1(2606.3,2283.46) ; U1.8@2826.04,2883.02 2877.68,2883.02 2891.65,2869.06 2891.65,2553.06 v1(2889.76,2551.18) 2903.94,2537 J11.2 3058.43,2464.57 3440.94,2464.57 v1(3748.03,2771.65) ; U14.4 v1(4314.37,3960.04) ; U6.27 4366.7,2338.85 4366.7,2398.2 v1(4370.07,2401.57) ; v1(4448.81,2417.32) 4448.81,2430.17 R7.1 4554.12,2782.46 4692.91,2921.26 v1(4984.25,2921.26) 5051.14,2921.26 U5.5 ; v1(5268.54,4055.95) U2.5 5299.6,3968.9 5338.58,4007.88 v1(5338.58,4015.75)
  Bottom Layer w20: v1(2606.3,2283.46) 2606.3,2306.3 2738.53,2438.53 2738.53,2513.05 2762.54,2537.06 2875.65,2537.06 v1(2889.76,2551.18) ; v1(3748.03,2771.65) 3776.66,2771.65 4124.75,2423.57 4348.07,2423.57 v1(4370.07,2401.57) 4433.07,2401.58 v1(4448.81,2417.32) ; v1(4314.37,3960.04) 5172.64,3960.04 v1(5268.54,4055.95) ; v1(4984.25,2921.26) 4984.25,2937.01 4944.88,2976.38 4944.88,3118.11 5007.87,3181.1 5086.61,3181.1 5251.97,3346.46 5251.97,3661.42 5338.58,3748.03 v1(5338.58,4015.75)
SELECT: CN1.6 R15.1 SW2.1 SW2.2 U6.11 | length 1994.9
  Top Layer w10: CN1.6 3599.21,800.79 3441.87,958.13 SW2.1 SW2.2 3441.87,1469.43 R15.1 3826.2,1853.76 4203.89,1853.76 4267.72,1917.6 U6.11
SO-K: U6.12 U18.7 | length 2028
  Top Layer w10: U18.7 2781.49,1086.49 v1(2820,1125) ; v1(3650,1550) 3932.76,1832.76 4212.59,1832.76 4299.21,1919.39 U6.12
  Bottom Layer w10: v1(2820,1125) 3225,1125 v1(3650,1550)
THERMISTOR-A: P13.2 R28.2 U6.24 | length 2724.8
  Top Layer w20: U6.24 v1(4559.05,2275.59) ; v1(4779.53,3889.76) 4685.04,3984.25 4685.04,4472.44 4716.43,4503.83 R28.2 4795.86,4512.83 P13.2
  Bottom Layer w20: v1(4559.05,2275.59) 4574.05,2290.59 4574.05,2339.41 4586.35,2351.71 4609.98,2351.71 4779.53,2521.26 v1(4779.53,3779.53) v1(4779.53,3889.76)
THERMISTOR-B: P14.2 R29.2 U6.23 | length 2913.6
  Top Layer w20: U6.23 4488.46,2239.59 4537.07,2239.59 4543.07,2233.59 4544.14,2233.59 4547.76,2229.97 4571.41,2229.97 4648.53,2307.09 4697.92,2307.09 4723.17,2281.83 4749.66,2281.83 4811.02,2220.47 4811.02,2118.11 4746,2053.09 4746,2018.02 4721.98,1994 4517.81,1994 v1(4511.81,2000) ; v1(4511.81,1858.27) 4619.32,1750.76 v1(4619.32,1246.82) ; v1(4619.32,244.09) 4663.78,199.63 ; P14.2 4663.78,199.63 ; R29.2 4663.78,199.63
  Bottom Layer w20: v1(4511.81,1858.27) v1(4511.81,2000) ; v1(4619.32,244.09) v1(4619.32,1246.82)
UP: CN1.5 R17.1 SW4.1 SW4.2 U6.15 | length 1858
  Top Layer w10: R17.1 4393.7,1611.1 U6.15
  Top Layer w20: v1(4222.44,1041.34) SW4.1 SW4.2 4276.58,1243.1 v1(4267.71,1251.97) ; R17.1 4335.51,1496.06 v1(4385.83,1496.06)
  Bottom Layer w20: CN1.5 4110.63,1041.34 v1(4222.44,1041.34) ; v1(4267.71,1251.97) 4275.59,1251.97 4385.83,1362.2 v1(4385.83,1496.06)
VCC-3V3: C17.2 C18.+ R21.2 R24.2 R25.2 R26.2 R33.2 U17.2 X1.8 | length 2482.1
  Top Layer w20: U17.2 5636.91,1977.96 R21.2 5685.04,1793.11 5685.04,1710.38 R33.2 5736.91,1608.24 R25.2 5881.89,1611.26 5889.76,1619.13 v1(5889.76,1692.91) ; v1(5944.88,1496.06) 5944.88,1325.38 6012.03,1258.23 X1.8 6175.9,1101.24 C18.+ ; C17.2 6261.91,1014.72 C18.+ ; R26.2 6817.91,1161.24 R24.2 6737.67,1157.48 6314.96,1157.48 6261.91,1104.43 C18.+
  Bottom Layer w20: v1(5889.76,1692.91) 5897.64,1692.91 5944.88,1645.67 v1(5944.88,1496.06)
VCC-5V: C7.2 C10.+ C11.2 C22.+ J5.2 J9.3 J10.3 J12.1 P3.3 P8.6 R3.1 R4.2 R7.2 R8.2 U1.2 U3.A1 U3.B1 U6.4 U6.6 U6.18 U7.OUT+ U13.8 | length 11368.2
  Top Layer w10: J5.2 1347.06,250.1 U7.OUT+ 2527.18,1430.22 C22.+ ; 2165.71,2992.13 2165.71,3441.3 2287.6,3563.19 2287.6,4027.6 2515,4255 2515,4275 2495,4295 2357.93,4295 2287.6,4365.34 U13.8 ; J9.3 2165.35,2996.35 2165.35,2757.65 J10.3 2477.53,2682 C7.2 2613.47,2649.53 R3.1 2681,2647 R4.2 ; v1(2622.05,1503.94) 2622.05,1432.31 C22.+ ; U1.2 2654.04,2964.02 2607.47,2964.02 2593.47,2978.02 2593.47,3184.79 2617.21,3208.53 2685.04,3208.53 ; U3.B1 U3.A1 2714.13,1446.42 2723.62,1455.91 v1(2727.29,1455.91) ; P3.3 2755.91,3246.09 2755.91,3241.08 2723.36,3208.53 2685.04,3208.53 ; v1(2779.53,2496.06) 2724.5,2551.09 2724.5,2593.99 2696,2622.49 R4.2 ; v1(2831.46,2370.08) 2831.46,1757.55 J12.1 2664.13,1470.22 C22.+ ; C10.+ 3960.43,2175 3997.39,2211.95 3997.39,2172.61 4051.89,2118.11 U6.6 4155.46,2108.61 4185,2108.61 ; U6.4 4155.46,2171.6 4175.52,2171.6 4185,2162.12 4185,2108.61 ; R8.2 4476.29,2543.31 R7.2 4409.45,2460.81 4409.45,2393.7 4432.77,2370.38 4476.94,2370.38 4481.15,2374.58 4510.97,2374.58 4532.06,2353.49 4532.06,2323.67 4505.99,2297.59 4454.4,2297.59 4447.96,2291.15 4447.96,2258.98 4414.7,2225.72 4411.03,2225.72 4365.57,2180.26 4365.57,2122.62 v1@4413.96,2074.23 ; U6.18 4433.07,2086.61 v1(4417.32,2070.87) v1@4413.96,2074.23 ; v1(4945.67,2070.08) P8.6 ; 2685.04,3208.53 2685.04,3157.48 2686.12,3158.56 2755.91,3088.78 2755.91,2779.53 2696,2719.62 R4.2 ; 4185,2108.61 4265.67,2108.61 4294.71,2079.58 4294.71,2071.7 4315.8,2050.61 4345.62,2050.61 4369.24,2074.23 v1@4413.96,2074.23
  Bottom Layer w10: v1(2622.05,1503.94) 2629.92,1503.94 2677.95,1455.91 v1(2727.29,1455.91) ; v1(2779.53,2496.06) 2834.65,2440.94 ; v1(2831.46,2370.08) 2831.46,2437.76 2834.65,2440.94 ; v1(4945.67,2070.08) 4859.84,1984.25 4586.88,1984.25 4530.93,2040.21 4530.93,2063.83 4523.89,2070.87 v1(4417.32,2070.87) 4390.84,2097.35 4370.88,2097.35 4337.75,2130.49 4315.8,2130.49 4298.92,2113.61 3161.98,2113.61 2834.65,2440.94
VCC-5V-EN: C1.2 C2.+ C5.+ C6.2 C15.+ C16.2 C20.+ C21.2 CN1.3 D3.2 J12.3 J13.1 J14.1 J15.3 R6.1 R15.2 R16.2 R17.2 R18.1 R19.1 R20.2 R28.1 R29.1 R31.2 U2.8 U3.A2 U3.B2 U5.8 U14.1 U15.3 U16.3 U17.3 U18.4 U19.VDD Z1.41 Z1.42 Z1.43 Z1.44 Z1.45 Z1.46 Z1.47 Z1.48 Z1.49 Z1.50 Z2.41 Z2.42 Z2.43 Z2.44 Z2.45 Z2.46 Z2.47 Z2.48 Z2.49 Z2.50 | length 23329.5
  Top Layer w20: C21.2 2486.49,853.51 2495.28,844.72 C20.+ 2639.99,844.72 2708.66,913.39 ; U3.A2@2735.94,1414.91 2735.94,1397.34 2760.14,1397.34 2763.78,1393.7 ; U18.4 2881.49,878.84 2848.47,911.86 2844.05,911.86 2842.52,913.39 2708.66,913.39 ; C16.2 3350.47,3960 C15.+ ; D3.2 3401.12,2118.37 R6.1 3492.13,1935.47 3492.13,1649.61 ; C15.+@3475.04,3960.04 U14.1 3763.78,3794.45 v1(3763.78,3677.17) ; v1(3535.43,1692.91) 3492.13,1649.61 ; v1(3818.9,1582.68) 3898.5,1582.68 R16.2 ; CN1.3 3993.7,724.41 4283.59,724.41 4315.22,692.78 4315.22,1449.16 4263.59,1500.79 4263.59,1548.19 ; R16.2@3905.51,1598.43 v1(3952.76,1645.67) ; v1(4209.6,1548.19) 4263.59,1548.19 ; R17.2 4307.09,1560.49 4275.89,1560.49 4263.59,1548.19 ; 4312.67,690.23 4682.9,320 4704.83,346.46 5032.53,346.46 ; v1(4692.91,2755.91) 4929.13,2755.91 5209.98,2475.06 5209.98,1928.31 5045,1763.33 5045,405.98 R19.1@5096.03,354.95 ; R28.1 4811.39,4458.36 5196.02,4458.36 U15.3 ; C1.2 4959.49,3922.38 C2.+ 5082.06,3968.9 U2.8 ; J14.1 5032.53,199.46 5032.53,346.46 ; U16.3 R19.1@5096.03,354.95 ; v1(5108.03,262.05) R19.1 R19.1@5104.53,346.46 ; v1(5301.42,262.05) 5409.45,370.08 R20.2 5411.14,510 5547.17,510 J15.3 5618.79,581.62 U19.VDD 5729.79,797.77 5251.97,1275.59 5251.97,1889.76 5464.57,2102.36 ; J13.1 5424.02,4426.43 R18.1 5201.02,4449.43 U15.3 ; Z2.50 Z2.49 Z2.48 Z2.47 Z2.46 Z2.45 Z2.44 Z2.43 Z2.42 Z2.41 7265,4175 Z1.50 Z1.49 Z1.48 Z1.47 Z1.46 Z1.45 Z1.44 Z1.43 Z1.42 Z1.41 7265,3025 6835,2595 6344.1,2595 U17.3 5616.66,2102.36 5464.57,2102.36 ; 2708.66,913.39 2685,937.05 2685,1115 2763.78,1193.78 2763.78,1393.7 ; 2763.78,1393.7 2817.61,1393.7 R31.2 2844.13,1570.22 J12.3 2864.67,1589.69 R15.2 3492.13,1649.61 ; 5032.53,346.46 R19.1@5104.53,346.46 ; R19.1@5096.03,354.95 R19.1@5104.53,346.46 ; U2.8 5125.98,3961.46 5125.98,3897.64 5076.54,3848.2 5076.54,3790.75 5015.75,3729.95 5015.75,3377.95 5233.32,3160.38 5233.32,3062.63 5203.14,3032.46 U5.8 5234.62,2919.26 C5.+ 5301.61,2986.25 C6.2 5464.57,2887.83 5464.57,2102.36 ; U2.8 5118.11,3969.33 5118.11,4376.53 U15.3
  Bottom Layer w20: v1(3535.43,1692.91) 3708.66,1692.91 v1(3818.9,1582.68) ; v1(3763.78,3677.17) 3771.65,3677.17 v1(4692.91,2755.91) ; v1(3952.76,1645.67) 4050.24,1548.19 v1(4209.6,1548.19) ; v1(5108.03,262.05) v1(5301.42,262.05) ; J13.1 5766.43,4426.43 Z2.50
VDVR-IN: R11.1 R12.2 U6.22 | length 6300.4
  Top Layer w10: v1(614.17,4574.8) 614.17,4495.67 R12.2 ; U6.22 4483.96,2210.8 4485.79,2208.97 4610.55,2208.97 4657.21,2255.64 v1(4657.21,2257.79) ; v1(4614.17,2661.42) 4614.17,2515.9 4615,2515.07 4615,2416.5 4703.41,2328.09 4734.91,2328.09 v1(4740.16,2322.83) 4771.64,2322.83 v1(4826.76,2267.71)
  Top Layer w20: R12.2 712.2,4405.51 R11.1
  Bottom Layer w10: v1(614.17,4574.8) 732.28,4692.91 2687.09,4692.91 2805,4575 2805,4350 2855,4300 2985,4300 4614.17,2670.83 v1(4614.17,2661.42) ; v1(4657.21,2257.79) 4659.27,2259.84 4818.9,2259.84 v1(4826.76,2267.71)
WAKE-UP: J12.2 U3.C1 U6.26 | length 2347.3
  Top Layer w10: U3.C1 2679.58,1375.54 2679.58,1459.11 2764.13,1543.66 J12.2
  Top Layer w20: J12.2 2815.63,1590.22 2815.63,1610.31 2844.04,1638.72 2977.3,1638.72 v1(3007.87,1669.29) ; v1(4330.71,2086.61) 4330.71,2094.49 4340.21,2103.99 4340.21,2187.75 4400,2247.53 4400,2300.93 4393.7,2307.23 U6.26
  Bottom Layer w20: v1(3007.87,1669.29) 3220.47,1669.29 3629.92,2078.74 4322.83,2078.74 v1(4330.71,2086.61)
XTAL1: C12.2 U6.7 Y1.1 | length 242.2
  Top Layer w30: C12.2 4001.79,2056.48 Y1.1 4040.58,2086.61 4111.76,2086.61
XTAL2: C13.2 U6.8 Y1.2 | length 327
  Top Layer w10: C13.2 Y1.2 4006.12,1915.27 U6.8
pads on no net: "U9. " J11.3 U2.7 U5.7 U12.5 U17.0 U18.8 U19. U19.NC X1.2 X1.4 X1.5 X1.6 X1.7 X1.13 X1.14 Z1.11 Z1.12 Z1.13 Z1.14 Z1.15 Z1.16 Z1.17 Z1.18 Z1.19 Z1.20 Z1.21 Z1.22 Z1.23 Z1.24 Z1.25 Z1.26 Z1.27 Z1.28 Z1.29 Z1.30 Z1.31 Z1.32 Z1.33 Z1.34 Z1.35 Z1.36 Z1.37 Z1.38 Z1.39 Z1.40 Z2.11 Z2.12 Z2.13 Z2.14 Z2.15 Z2.16 Z2.17 Z2.18 Z2.19 Z2.20 Z2.21 Z2.22 Z2.23 Z2.24 Z2.25 Z2.26 Z2.27 Z2.28 Z2.29 Z2.30 Z2.31 Z2.32 Z2.33 Z2.34 Z2.35 Z2.36 Z2.37 Z2.38 Z2.39 Z2.40

## Polygon pours and split planes (outlines as drawn)
GND on Top Layer "GND" (solid, remove dead copper, pour order 32): 25,25 7375,25 7375,4725 25,4725 25,25

## Silkscreen, mask and mechanical layers (free items; w line width, h text height)
Top Overlay:
  lines w9.84: 6799.21,2425.2 6799.21,2251.97 7023.62,2251.97 ; 6803.15,2425.2 7019.69,2425.2 ; 6909.45,2251.97 6909.45,2425.2 ; 7023.62,2255.91 7023.62,2425.2
  lines w19.68: 3204.72,779.53 3208.66,783.46 ; 3822.83,960.63 3905.51,877.95 3917.32,877.95 4000,960.63 ; 4232.28,881.89 4314.96,964.57 4326.77,964.57 4409.45,881.89 ; 4519.69,1401.57 4523.62,1397.64 ; 4523.62,787.4 4527.56,783.46
  lines w39.37: 3204.72,779.53 3204.72,1401.57 4519.69,1401.57 ; 3208.66,783.46 4527.56,783.46 ; 4523.62,787.4 4523.62,1397.64
  text "Temp4-NTC" at 4490,4635 h59.06
  text "EN-ACS OUT" at 1215,4250 h59.06
  text "Temp1" at 5230,4250 h59.06
  text "SOLAR INPUT" at 3555,4130 h59.06
  text "RTC" at 4875,3680 h59.06
  text "OLED  / 128x64" at 3920,3340 h59.06
  text "EEPROM" at 5031.5,2732.28 h59.06
  text "SIMON / Solar / Intelligent / Monitor" at 6080,2725 h118.11
  text "V1.0.1 MA" at 6100,2570 h78.74
  text "4" at 7043.31,2374.02 h39.37
  text "2" at 6751.97,2366.14 h39.37
  text "Wi-Fi ESP8266" at 5960.63,2263.78 h59.06
  text "1" at 6763.78,2255.91 h39.37
  text "3" at 7062.99,2251.97 h39.37
  text "uC Prog" at 5160,2110 h59.06 r90
  text "uC" at 7177.17,2086.61 h78.74
  text "ESP" at 7181.1,1956.69 h78.74
  text "EN-LTC OUT" at 2540,1775 h59.06
  text "Li-Ion 18650 Battery Cell" at 250,1745 h59.06 r90
  text "LiPo Charger" at 1795,1515 h59.06 r90
  text "SEL" at 3290,840 h118.11
  text "Temp2" at 5025,760 h59.06
  text "DHT-22 T/H" at 6100,760 h59.06
  text "3.7 > 5V" at 1410,715 h59.06
  text "SOLAR OUTPUT" at 3540,505 h59.06
  text "Temp5-NTC" at 4340,420 h59.06
  text "Fuel Gauge" at 365,315 h59.06
  text "Temp3" at 6965,290 h59.06 r90
  text "Thermocouple" at 2435,35 h59.06 r90
Mechanical 1:
  the board outline again, w19.68

## Text inside footprints (layer, text, board x,y; h text height)
P3: Top Overlay "6" at 2531.5,3141.73 h50; Top Overlay "5" at 2535.43,3291.34 h50; Top Overlay "2" at 2901.57,3133.86 h50; Top Overlay "1" at 2901.57,3244.09 h50
P12: Top Overlay "1" at 6740.16,2000 h50; Top Overlay "2" at 6748.03,2086.61 h50; Top Overlay "4" at 7047.24,2070.87 h50; Top Overlay "3" at 7047.24,1964.57 h50
P15: Top Overlay "T+" at 2992.13,598.43 h78.74; Top Overlay "T-" at 2598.43,598.43 h78.74
U8: Top Overlay "OUT+" at 1850,1645 h39.37 r270; Top Overlay "B+" at 1638.1,1459.8 h39.37 r270; Top Overlay "B-" at 1429.92,1531.2 h39.37 r270; Top Overlay "OUT-" at 1308.22,1612.3 h39.37 r270; Top Overlay "IN+" at 1849.72,2252.5 h39.37 r270; Top Overlay "IN-" at 1299.72,2252.5 h39.37 r270; Top Overlay "TP4056" at 1709.4,1842.18 h39.37 r180
U11: Top Overlay "LM2596HV based" at 1560.2,3824.38 h80 r270; Top Overlay "DC-DC converter" at 1450.2,3824.38 h80 r270; Top Overlay "- IN +" at 1396,3953 h80; Top Overlay "+OUT-" at 1810.2,2634.38 h80 r180
U14: Top Overlay "GND" at 3937.01,3842.52 h39.37; Top Overlay "VCC" at 3755.91,3889.76 h39.37; Top Overlay "SDA" at 4299.37,3930.35 h39.37; Top Overlay "SCL" at 4099.37,3850.35 h39.37
U15: Top Overlay "3" at 5267.72,4338.58 h59.05; Top Overlay "1" at 5283.46,4566.93 h59.05
U16: Top Overlay "3" at 4976.38,472.44 h59.05 r270; Top Overlay "1" at 5228.35,456.69 h59.05 r270
X1: Top Overlay "Antenna" at 6310.25,1959.02 h42.5